# EAGLE board A-14732-40009 (EAGLE 7.4.0)

Size 160 x 100 mm. Coordinates in mm from the lower left corner, seen from the top.
Outline: 0,0 160,0 160,100 0,100 0,0
Copper layers (1*16): Top 0.035mm / dielectric 1.5mm / Bottom 0.035mm
Design rules "default": minimum track width 10mil, minimum drill 24mil, track to track 8mil, track to pad 8mil, pad to pad 8mil, via to via 8mil, smd to smd 8mil, copper to edge 40mil, drill to drill 8mil, minimum pad ring 10mil, minimum via ring 8mil, stop-mask expansion 4mil, vias tented up to drill 0mil, thermal gap 10mil

## Footprints (pad centres in the part's own frame; a part is rotated, then mirrored left to right if it is on the bottom)
NIC_10X10.5_CAP = smd 4.5 x 2.5: + 4.5,0; - -4.5,0
1206-CAP = smd 1.6 x 1.8: 1 -1.4,0; 2 1.4,0
0805-CAP = smd 0.8 x 1.2: 1 -0.9,0; 2 0.9,0
EIA3216 = smd 1.4 x 1.6: A 1.4,0; C -1.4,0
SMA-DIODE = smd 1.27 x 1.47: A -2.15,0; C 2.15,0
NPI75C = smd 3 x 7.5: 1 -2.5,0; 2 2.5,0
STANDOFF-ELECTRICAL = drill 3.2 pad 6.35: P1 0,0
2X10_ROUND_NOSILK = drill 1.016 pad 1.88: 1 -11.43,-1.27; 2 -11.43,1.27; 3 -8.89,-1.27; 4 -8.89,1.27; 5 -6.35,-1.27; 6 -6.35,1.27; 7 -3.81,-1.27; 8 -3.81,1.27; 9 -1.27,-1.27; 10 -1.27,1.27; 11 1.27,-1.27; 12 1.27,1.27; 13 3.81,-1.27; 14 3.81,1.27; 15 6.35,-1.27; 16 6.35,1.27; 17 8.89,-1.27; 18 8.89,1.27; 19 11.43,-1.27; 20 11.43,1.27
1X03_LONGPADS = drill 1.118 pad 1.88 long: 1 0,0; 2 2.54,0; 3 5.08,0
1X04_LONGPADS = drill 1.118 pad 1.88 long: 1 0,0; 2 2.54,0; 3 5.08,0; 4 7.62,0
1X4MTA = drill 1.676 long: 1 5.944,0; 2 1.981,0; 3 -1.981,0; 4 -5.944,0
1X6MTA = drill 1.676 long: 1 9.906,0; 2 5.944,0; 3 1.981,0; 4 -1.981,0; 5 -5.944,0; 6 -9.906,0
SOT23-3 = smd 0.8 x 0.9: 1 -0.95,-1; 2 0.95,-1; 3 0,1.1
R1206 = smd 1.6 x 1.803: 1 -1.422,0; 2 1.422,0
OKI6295 = smd 0.4 x 2.2: 1 -4,-6.25; 2 -3.2,-6.25; 3 -2.4,-6.25; 4 -1.6,-6.25; 5 -0.8,-6.25; 6 0,-6.25; 7 0.8,-6.25; 8 1.6,-6.25; 9 2.4,-6.24; 10 3.2,-6.25; 11 4,-6.25; 23 4,6.25; 24 3.2,6.25; 25 2.4,6.26; 26 1.6,6.25; 27 0.8,6.25; 28 0,6.25; 29 -0.8,6.25; 30 -1.6,6.25; 31 -2.4,6.25; 32 -3.2,6.25; 33 -4,6.25 | smd 2.2 x 0.4: 12 6.75,-4; 13 6.75,-3.2; 14 6.75,-2.4; 15 6.75,-1.6; 16 6.75,-0.8; 17 6.75,0; 18 6.75,0.8; 19 6.75,1.6; 20 6.74,2.4; 21 6.75,3.2; 22 6.75,4; 34 -6.75,4; 35 -6.75,3.2; 36 -6.76,2.4; 37 -6.75,1.6; 38 -6.75,0.8; 39 -6.75,0; 40 -6.75,-0.8; 41 -6.75,-1.6; 42 -6.75,-2.4; 43 -6.75,-3.2; 44 -6.75,-4
MS6264L = drill 0.813 long: 1 -16.51,-7.62; 2 -13.97,-7.62; 3 -11.43,-7.62; 4 -8.89,-7.62; 5 -6.35,-7.62; 6 -3.81,-7.62; 7 -1.27,-7.62; 8 1.27,-7.62; 9 3.81,-7.62; 10 6.35,-7.62; 11 8.89,-7.62; 12 11.43,-7.62; 13 13.97,-7.62; 14 16.51,-7.62; 15 16.51,7.62; 16 13.97,7.62; 17 11.43,7.62; 18 8.89,7.62; 19 6.35,7.62; 20 3.81,7.62; 21 1.27,7.62; 22 -1.27,7.62; 23 -3.81,7.62; 24 -6.35,7.62; 25 -8.89,7.62; 26 -11.43,7.62; 27 -13.97,7.62; 28 -16.51,7.62
27C040 = drill 0.813 long: 1 -19.05,-7.62; 2 -16.51,-7.62; 3 -13.97,-7.62; 4 -11.43,-7.62; 5 -8.89,-7.62; 6 -6.35,-7.62; 7 -3.81,-7.62; 8 -1.27,-7.62; 9 1.27,-7.62; 10 3.81,-7.62; 11 6.35,-7.62; 12 8.89,-7.62; 13 11.43,-7.62; 14 13.97,-7.62; 15 16.51,-7.62; 16 19.05,-7.62; 17 19.05,7.62; 18 16.51,7.62; 19 13.97,7.62; 20 11.43,7.62; 21 8.89,7.62; 22 6.35,7.62; 23 3.81,7.62; 24 1.27,7.62; 25 -1.27,7.62; 26 -3.81,7.62; 27 -6.35,7.62; 28 -8.89,7.62; 29 -11.43,7.62; 30 -13.97,7.62; 31 -16.51,7.62; 32 -19.05,7.62
6809E = drill 0.813 long: 1 -24.13,-7.62; 2 -21.59,-7.62; 3 -19.05,-7.62; 4 -16.51,-7.62; 5 -13.97,-7.62; 6 -11.43,-7.62; 7 -8.89,-7.62; 8 -6.35,-7.62; 9 -3.81,-7.62; 10 -1.27,-7.62; 11 1.27,-7.62; 12 3.81,-7.62; 13 6.35,-7.62; 14 8.89,-7.62; 15 11.43,-7.62; 16 13.97,-7.62; 17 16.51,-7.62; 18 19.05,-7.62; 19 21.59,-7.62; 20 24.13,-7.62; 21 24.13,7.62; 22 21.59,7.62; 23 19.05,7.62; 24 16.51,7.62; 25 13.97,7.62; 26 11.43,7.62; 27 8.89,7.62; 28 6.35,7.62; 29 3.81,7.62; 30 1.27,7.62; 31 -1.27,7.62; 32 -3.81,7.62; 33 -6.35,7.62; 34 -8.89,7.62; 35 -11.43,7.62; 36 -13.97,7.62; 37 -16.51,7.62; 38 -19.05,7.62; 39 -21.59,7.62; 40 -24.13,7.62
SO20W = smd 0.66 x 2.032: 1 -5.715,-5.029; 2 -4.445,-5.029; 3 -3.175,-5.029; 4 -1.905,-5.029; 5 -0.635,-5.029; 6 0.635,-5.029; 7 1.905,-5.029; 8 3.175,-5.029; 9 4.445,-5.029; 10 5.715,-5.029; 11 5.715,5.029; 12 4.445,5.029; 13 3.175,5.029; 14 1.905,5.029; 15 0.635,5.029; 16 -0.635,5.029; 17 -1.905,5.029; 18 -3.175,5.029; 19 -4.445,5.029; 20 -5.715,5.029
SO16 = smd 0.66 x 2.032: 1 -4.445,-3.073; 2 -3.175,-3.073; 3 -1.905,-3.073; 4 -0.635,-3.073; 5 0.635,-3.073; 6 1.905,-3.073; 7 3.175,-3.073; 8 4.445,-3.073; 9 4.445,3.073; 10 3.175,3.073; 11 1.905,3.073; 12 0.635,3.073; 13 -0.635,3.073; 14 -1.905,3.073; 15 -3.175,3.073; 16 -4.445,3.073
SO14 = smd 0.66 x 2.032: 1 -3.81,-3.073; 2 -2.54,-3.073; 3 -1.27,-3.073; 4 0,-3.073; 5 1.27,-3.073; 6 2.54,-3.073; 7 3.81,-3.073; 8 3.81,3.073; 9 2.54,3.073; 10 1.27,3.073; 11 0,3.073; 12 -1.27,3.073; 13 -2.54,3.073; 14 -3.81,3.073
YM2151 = drill 0.813 long: 1 -13.97,-7.62; 2 -11.43,-7.62; 3 -8.89,-7.62; 4 -6.35,-7.62; 5 -3.81,-7.62; 6 -1.27,-7.62; 7 1.27,-7.62; 8 3.81,-7.62; 9 6.35,-7.62; 10 8.89,-7.62; 11 11.43,-7.62; 12 13.97,-7.62; 13 13.97,7.62; 14 11.43,7.62; 15 8.89,7.62; 16 6.35,7.62; 17 3.81,7.62; 18 1.27,7.62; 19 -1.27,7.62; 20 -3.81,7.62; 21 -6.35,7.62; 22 -8.89,7.62; 23 -11.43,7.62; 24 -13.97,7.62
SOIC16N = smd 0.6 x 2.2: 1 -4.445,-2.6; 2 -3.175,-2.6; 3 -1.905,-2.6; 4 -0.635,-2.6; 5 0.635,-2.6; 6 1.905,-2.6; 7 3.175,-2.6; 8 4.445,-2.6; 9 4.445,2.6; 10 3.175,2.6; 11 1.905,2.6; 12 0.635,2.6; 13 -0.635,2.6; 14 -1.905,2.6; 15 -3.175,2.6; 16 -4.445,2.6
16L8 = drill 0.813 long: 1 -11.43,-3.81; 2 -8.89,-3.81; 3 -6.35,-3.81; 4 -3.81,-3.81; 5 -1.27,-3.81; 6 1.27,-3.81; 7 3.81,-3.81; 8 6.35,-3.81; 9 8.89,-3.81; 10 11.43,-3.81; 11 11.43,3.81; 12 8.89,3.81; 13 6.35,3.81; 14 3.81,3.81; 15 1.27,3.81; 16 -1.27,3.81; 17 -3.81,3.81; 18 -6.35,3.81; 19 -8.89,3.81; 20 -11.43,3.81
YM3012 = drill 0.813 long: 1 -8.89,-3.81; 2 -6.35,-3.81; 3 -3.81,-3.81; 4 -1.27,-3.81; 5 1.27,-3.81; 6 3.81,-3.81; 7 6.35,-3.81; 8 8.89,-3.81; 9 8.89,3.81; 10 6.35,3.81; 11 3.81,3.81; 12 1.27,3.81; 13 -1.27,3.81; 14 -3.81,3.81; 15 -6.35,3.81; 16 -8.89,3.81
SO14' = smd 0.6 x 2.2: 1 -3.81,-2.6; 2 -2.54,-2.6; 3 -1.27,-2.6; 4 0,-2.6; 5 1.27,-2.6; 6 2.54,-2.6; 7 3.81,-2.6; 8 3.81,2.6; 9 2.54,2.6; 10 1.27,2.6; 11 0,2.6; 12 -1.27,2.6; 13 -2.54,2.6; 14 -3.81,2.6
MC3340 = drill 0.813 long: 1 -3.81,-3.81; 2 -1.27,-3.81; 3 1.27,-3.81; 4 3.81,-3.81; 5 3.81,3.81; 6 1.27,3.81; 7 -1.27,3.81; 8 -3.81,3.81
ZIP15 = drill 0.813: 1 -10.16,-1.27 | drill 0.813 octagon: 2 -8.89,1.27; 3 -7.62,-1.27; 4 -6.35,1.27; 5 -5.08,-1.27; 6 -3.81,1.27; 7 -2.54,-1.27; 8 -1.27,1.27; 9 0,-1.27; 10 1.27,1.27; 11 2.54,-1.27; 12 3.81,1.27; 13 5.08,-1.27; 14 6.35,1.27; 15 7.62,-1.27
7809-D2PAK = smd 2.083 x 3.81: 1 -2.54,-8.89; 3 2.54,-8.89 | smd 11.43 x 8.89: 2 0,2.54
SJ = smd 1.168 x 1.6: 1 -0.762,0; 2 0.762,0
SM49 = smd 5.08 x 1.778: 1 -4.826,0; 2 4.826,0
CRYSTAL-OSC-SMD-5X3 = smd 1.9 x 1.1: 1 -1.85,-1.15; 2 1.85,-1.15; 3 1.85,1.15; 4 -1.85,1.15

## Placement (x,y rotation side)
C1  47uF  [NIC_10X10.5_CAP]  -99.06,67.31 0 top  (outside the outline)
C2  .01uF  [1206-CAP]  -57.15,146.05 0 top  (outside the outline)
C3  .01uF  [1206-CAP]  -62.23,146.05 0 top  (outside the outline)
C4  .01uF  [1206-CAP]  -67.31,146.05 0 top  (outside the outline)
C5  .01uF  [1206-CAP]  -72.39,146.05 0 top  (outside the outline)
C6  .01uF  [1206-CAP]  -77.47,146.05 0 top  (outside the outline)
C7  .01uF  [1206-CAP]  -82.55,146.05 0 top  (outside the outline)
C8  .01uF  [1206-CAP]  -87.63,146.05 0 top  (outside the outline)
C9  .01uF  [1206-CAP]  -92.71,146.05 0 top  (outside the outline)
C10  .01uF  [1206-CAP]  -97.79,146.05 0 top  (outside the outline)
C11  .01uF  [1206-CAP]  -102.87,146.05 0 top  (outside the outline)
C12  .01uF  [1206-CAP]  -107.95,146.05 0 top  (outside the outline)
C13  .01uF  [1206-CAP]  -113.03,146.05 0 top  (outside the outline)
C14  .01uF  [1206-CAP]  -118.11,146.05 0 top  (outside the outline)
C15  .01uF  [1206-CAP]  -123.19,146.05 0 top  (outside the outline)
C16  .01uF  [1206-CAP]  -128.27,146.05 0 top  (outside the outline)
C17  .01uF  [1206-CAP]  -133.35,146.05 0 top  (outside the outline)
C18  .01uF  [1206-CAP]  -138.43,146.05 0 top  (outside the outline)
C19  .01uF  [1206-CAP]  -143.51,146.05 0 top  (outside the outline)
C20  .01uF  [1206-CAP]  -148.59,146.05 0 top  (outside the outline)
C21  .01uF  [1206-CAP]  -15.24,151.13 0 top  (outside the outline)
C22  .01uF  [1206-CAP]  -20.32,151.13 0 top  (outside the outline)
C23  .01uF  [1206-CAP]  -25.4,151.13 0 top  (outside the outline)
C24  .01uF  [1206-CAP]  -30.48,151.13 0 top  (outside the outline)
C25  .01uF  [1206-CAP]  -35.56,151.13 0 top  (outside the outline)
C26  .01uF  [1206-CAP]  -40.64,151.13 0 top  (outside the outline)
C28  .01uF  [1206-CAP]  -45.72,151.13 0 top  (outside the outline)
C29  .01uF  [1206-CAP]  -50.8,151.13 0 top  (outside the outline)
C30  33pF  [1206-CAP]  -55.88,151.13 0 top  (outside the outline)
C31  .01uF  [1206-CAP]  -60.96,151.13 0 top  (outside the outline)
C32  .01uF  [1206-CAP]  -66.04,151.13 0 top  (outside the outline)
C33  .01uF  [1206-CAP]  -71.12,151.13 0 top  (outside the outline)
C35  100pF  [1206-CAP]  -76.2,151.13 0 top  (outside the outline)
C36  100pF  [1206-CAP]  -81.28,151.13 0 top  (outside the outline)
C37  100pF  [1206-CAP]  -86.36,151.13 0 top  (outside the outline)
C38  100pF  [1206-CAP]  -91.44,151.13 0 top  (outside the outline)
C39  100pF  [1206-CAP]  -96.52,151.13 0 top  (outside the outline)
C40  100pF  [1206-CAP]  -101.6,151.13 0 top  (outside the outline)
C41  100pF  [1206-CAP]  -106.68,151.13 0 top  (outside the outline)
C42  100pF  [1206-CAP]  -111.76,151.13 0 top  (outside the outline)
C43  100pF  [1206-CAP]  -116.84,151.13 0 top  (outside the outline)
C44  100pF  [1206-CAP]  -121.92,151.13 0 top  (outside the outline)
C45  100pF  [1206-CAP]  -127,151.13 0 top  (outside the outline)
C46  10uF  [NIC_10X10.5_CAP]  -113.03,67.31 0 top  (outside the outline)
C47  100pF  [1206-CAP]  -132.08,151.13 0 top  (outside the outline)
C48  .001uF  [1206-CAP]  -137.16,151.13 0 top  (outside the outline)
C49  100pF  [1206-CAP]  -142.24,151.13 0 top  (outside the outline)
C50  68pF  [1206-CAP]  -147.32,151.13 0 top  (outside the outline)
C51  3.3nF  [1206-CAP]  -15.24,154.94 0 top  (outside the outline)
C52  3.9nF  [1206-CAP]  -20.32,154.94 0 top  (outside the outline)
C53  10uF  [NIC_10X10.5_CAP]  -127,67.31 0 top  (outside the outline)
C54  220pF  [1206-CAP]  -25.4,154.94 0 top  (outside the outline)
C55  .001uF  [1206-CAP]  -30.48,154.94 0 top  (outside the outline)
C56  3.3nF  [1206-CAP]  -35.56,154.94 0 top  (outside the outline)
C57  10uF  [NIC_10X10.5_CAP]  -140.97,67.31 0 top  (outside the outline)
C58  2.7nF  [1206-CAP]  -40.64,154.94 0 top  (outside the outline)
C60  33pF  [1206-CAP]  -45.72,154.94 0 top  (outside the outline)
C61  220pF  [1206-CAP]  -50.8,154.94 0 top  (outside the outline)
C62  68pF  [1206-CAP]  -55.88,154.94 0 top  (outside the outline)
C63  47uF  [NIC_10X10.5_CAP]  -20.32,80.01 0 top  (outside the outline)
C64  10uF  [NIC_10X10.5_CAP]  -34.29,80.01 0 top  (outside the outline)
C65  0.22uF  [0805-CAP]  -137.16,154.94 0 top  (outside the outline)
C66  47uF  [NIC_10X10.5_CAP]  -48.26,80.01 0 top  (outside the outline)
C68  1uF  [NIC_10X10.5_CAP]  -62.23,80.01 0 top  (outside the outline)
C69  2.2nF  [1206-CAP]  -60.96,154.94 0 top  (outside the outline)
C70  100uF  [NIC_10X10.5_CAP]  -76.2,80.01 0 top  (outside the outline)
C71  470pF  [1206-CAP]  -66.04,154.94 0 top  (outside the outline)
C72  0.1uF  [1206-CAP]  -71.12,154.94 0 top  (outside the outline)
C73  10uF  [NIC_10X10.5_CAP]  -90.17,80.01 0 top  (outside the outline)
C74  0.1uF  [1206-CAP]  -76.2,154.94 0 top  (outside the outline)
C75  10uF  [NIC_10X10.5_CAP]  -104.14,80.01 0 top  (outside the outline)
C76  .001uF  [1206-CAP]  -81.28,154.94 0 top  (outside the outline)
C78  820pF  [1206-CAP]  -86.36,154.94 0 top  (outside the outline)
C79  220uF  [NIC_10X10.5_CAP]  -118.11,80.01 0 top  (outside the outline)
C80  47uF  [NIC_10X10.5_CAP]  -132.08,80.01 0 top  (outside the outline)
C81  10uF  [NIC_10X10.5_CAP]  -146.05,80.01 0 top  (outside the outline)
C83  220uF  [NIC_10X10.5_CAP]  -20.32,91.44 0 top  (outside the outline)
C84  220uF  [NIC_10X10.5_CAP]  -34.29,91.44 0 top  (outside the outline)
C85  100uF  [NIC_10X10.5_CAP]  -48.26,91.44 0 top  (outside the outline)
C86  100uF  [NIC_10X10.5_CAP]  -62.23,91.44 0 top  (outside the outline)
C87  100uF  [NIC_10X10.5_CAP]  -76.2,91.44 0 top  (outside the outline)
C88  0.1uF  [1206-CAP]  -91.44,154.94 0 top  (outside the outline)
C89  0.1uF  [1206-CAP]  -96.52,154.94 0 top  (outside the outline)
C90  0.1uF  [1206-CAP]  -101.6,154.94 0 top  (outside the outline)
C91  0.1uF  [1206-CAP]  -106.68,154.94 0 top  (outside the outline)
C92  0.1uF  [1206-CAP]  -111.76,154.94 0 top  (outside the outline)
C95  2200uF  [NIC_10X10.5_CAP]  -90.17,91.44 0 top  (outside the outline)
C96  220pF  [1206-CAP]  -116.84,154.94 0 top  (outside the outline)
C97  .01uF  [1206-CAP]  -121.92,154.94 0 top  (outside the outline)
C98  100pF  [1206-CAP]  -127,154.94 0 top  (outside the outline)
C99  0.01uF  [1206-CAP]  -132.08,154.94 0 top  (outside the outline)
C100  10uF  [EIA3216]  -142.24,154.94 0 top  (outside the outline)
C102  10uF  [NIC_10X10.5_CAP]  -104.14,91.44 0 top  (outside the outline)
C103  100uF  [NIC_10X10.5_CAP]  -118.11,91.44 0 top  (outside the outline)
CR1  1N4148  [SMA-DIODE]  -50.8,146.05 0 top  (outside the outline)
L1  4.7uH  [NPI75C]  -125.73,110.49 0 top  (outside the outline)
L2  4.7uH  [NPI75C]  -134.62,110.49 0 top  (outside the outline)
MTG1  MTGHOLE  [STANDOFF-ELECTRICAL]  -63.5,119.38 0 top  (outside the outline)
MTG2  MTGHOLE  [STANDOFF-ELECTRICAL]  -71.12,119.38 0 top  (outside the outline)
MTG3  MTGHOLE  [STANDOFF-ELECTRICAL]  -78.74,119.38 0 top  (outside the outline)
MTG4  MTGHOLE  [STANDOFF-ELECTRICAL]  -86.36,119.38 0 top  (outside the outline)
P1  [2X10_ROUND_NOSILK]  -46.99,119.38 0 top  (outside the outline)
P2  AUX IN  [1X03_LONGPADS]  -67.31,101.6 0 top  (outside the outline)
P3  AUX OUT  [1X03_LONGPADS]  -58.42,101.6 0 top  (outside the outline)
P4  ORKIN R/W  [1X04_LONGPADS]  -48.26,101.6 0 top  (outside the outline)
P5  VOLUME  [1X4MTA]  -96.52,48.26 0 top  (outside the outline)
P6  0.156"  [1X6MTA]  -74.93,48.26 0 top  (outside the outline)
P7  0.156"  [1X4MTA]  -114.3,48.26 0 top  (outside the outline)
Q1  MPS3646  [SOT23-3]  -45.72,146.05 0 top  (outside the outline)
R1  4.7K  [R1206]  -35.56,128.27 0 top  (outside the outline)
R2  4.7K  [R1206]  -41.91,128.27 0 top  (outside the outline)
R3  4.7K  [R1206]  -48.26,128.27 0 top  (outside the outline)
R4  100  [R1206]  -46.99,134.62 0 top  (outside the outline)
R5  4.7K  [R1206]  -54.61,128.27 0 top  (outside the outline)
R6  4.7K  [R1206]  -60.96,128.27 0 top  (outside the outline)
R7  4.7K  [R1206]  -67.31,128.27 0 top  (outside the outline)
R8  4.7K  [R1206]  -73.66,128.27 0 top  (outside the outline)
R9  4.7K  [R1206]  -80.01,128.27 0 top  (outside the outline)
R10  4.7K  [R1206]  -86.36,128.27 0 top  (outside the outline)
R11  47  [R1206]  -52.07,134.62 0 top  (outside the outline)
R12  47  [R1206]  -57.15,134.62 0 top  (outside the outline)
R13  47  [R1206]  -62.23,134.62 0 top  (outside the outline)
R14  47  [R1206]  -67.31,134.62 0 top  (outside the outline)
R15  47  [R1206]  -72.39,134.62 0 top  (outside the outline)
R16  47  [R1206]  -77.47,134.62 0 top  (outside the outline)
R17  47  [R1206]  -82.55,134.62 0 top  (outside the outline)
R18  47  [R1206]  -87.63,134.62 0 top  (outside the outline)
R19  47  [R1206]  -92.71,134.62 0 top  (outside the outline)
R20  47  [R1206]  -97.79,134.62 0 top  (outside the outline)
R21  47  [R1206]  -102.87,134.62 0 top  (outside the outline)
R22  2.2K  [R1206]  -92.71,128.27 0 top  (outside the outline)
R23  2.2K  [R1206]  -99.06,128.27 0 top  (outside the outline)
R24  2.2K  [R1206]  -105.41,128.27 0 top  (outside the outline)
R25  4.7K  [R1206]  -111.76,128.27 0 top  (outside the outline)
R26  2.2K  [R1206]  -118.11,128.27 0 top  (outside the outline)
R27  4.7K  [R1206]  -124.46,128.27 0 top  (outside the outline)
R28  4.7K  [R1206]  -130.81,128.27 0 top  (outside the outline)
R29  47K  [R1206]  -107.95,134.62 0 top  (outside the outline)
R30  100  [R1206]  -113.03,134.62 0 top  (outside the outline)
R31  68K  [R1206]  -118.11,134.62 0 top  (outside the outline)
R32  470  [R1206]  -123.19,134.62 0 top  (outside the outline)
R33  100K  [R1206]  -93.98,119.38 0 top  (outside the outline)
R34  470  [R1206]  -128.27,134.62 0 top  (outside the outline)
R35  75K  [R1206]  -133.35,134.62 0 top  (outside the outline)
R36  39K  [R1206]  -138.43,134.62 0 top  (outside the outline)
R37  820K  [R1206]  -100.33,119.38 0 top  (outside the outline)
R38  62K  [R1206]  -143.51,134.62 0 top  (outside the outline)
R39  130K  [R1206]  -106.68,119.38 0 top  (outside the outline)
R40  150K  [R1206]  -113.03,119.38 0 top  (outside the outline)
R41  470  [R1206]  -148.59,134.62 0 top  (outside the outline)
R42  820K  [R1206]  -119.38,119.38 0 top  (outside the outline)
R43  1K  [R1206]  -15.24,140.97 0 top  (outside the outline)
R44  150K  [R1206]  -125.73,119.38 0 top  (outside the outline)
R45  62K  [R1206]  -20.32,140.97 0 top  (outside the outline)
R46  150K  [R1206]  -132.08,119.38 0 top  (outside the outline)
R48  100K  [R1206]  -138.43,119.38 0 top  (outside the outline)
R51  62K  [R1206]  -25.4,140.97 0 top  (outside the outline)
R52  150K  [R1206]  -144.78,119.38 0 top  (outside the outline)
R53  47K  [R1206]  -30.48,140.97 0 top  (outside the outline)
R54  100K  [R1206]  -151.13,119.38 0 top  (outside the outline)
R55  100K  [R1206]  -16.51,128.27 0 top  (outside the outline)
R59  2.2K  [R1206]  -137.16,128.27 0 top  (outside the outline)
R60  100K  [R1206]  -22.86,128.27 0 top  (outside the outline)
R61  2.2K  [R1206]  -143.51,128.27 0 top  (outside the outline)
R62  10K  [R1206]  -35.56,140.97 0 top  (outside the outline)
R63  10K  [R1206]  -40.64,140.97 0 top  (outside the outline)
R64  12K  [R1206]  -45.72,140.97 0 top  (outside the outline)
R65  100K  [R1206]  -29.21,128.27 0 top  (outside the outline)
R67  10K  [R1206]  -50.8,140.97 0 top  (outside the outline)
R68  1K  [R1206]  -55.88,140.97 0 top  (outside the outline)
R69  8.2K  [R1206]  -149.86,128.27 0 top  (outside the outline)
R70  10K  [R1206]  -60.96,140.97 0 top  (outside the outline)
R71  68K  [R1206]  -66.04,140.97 0 top  (outside the outline)
R72  3.3  [R1206]  -71.12,140.97 0 top  (outside the outline)
R73  3.3  [R1206]  -76.2,140.97 0 top  (outside the outline)
R74  3.3  [R1206]  -81.28,140.97 0 top  (outside the outline)
R77  56K  [R1206]  -86.36,140.97 0 top  (outside the outline)
R78  56K  [R1206]  -91.44,140.97 0 top  (outside the outline)
R79  82K  [R1206]  -96.52,140.97 0 top  (outside the outline)
R80  10K  [R1206]  -101.6,140.97 0 top  (outside the outline)
R81  47K  [R1206]  -106.68,140.97 0 top  (outside the outline)
R82  220  [R1206]  -111.76,140.97 0 top  (outside the outline)
R83  470  [R1206]  -116.84,140.97 0 top  (outside the outline)
R84  4.7K  [R1206]  -16.51,134.62 0 top  (outside the outline)
R85  4.7K  [R1206]  -22.86,134.62 0 top  (outside the outline)
R86  4.7K  [R1206]  -29.21,134.62 0 top  (outside the outline)
R87  3.9K  [R1206]  -35.56,134.62 0 top  (outside the outline)
R88  27K  [R1206]  -121.92,140.97 0 top  (outside the outline)
R89  10  [R1206]  -127,140.97 0 top  (outside the outline)
R90  100  [R1206]  -132.08,140.97 0 top  (outside the outline)
R91  4.7K  [R1206]  -41.91,134.62 0 top  (outside the outline)
U1  OKI6295  [OKI6295]  -54.61,48.26 0 top  (outside the outline)
U2  2064  [MS6264L]  -120.65,30.48 0 top  (outside the outline)
U3  27C040  [27C040]  -100.33,10.16 0 top  (outside the outline)
U4  6809E  [6809E]  -50.8,10.16 0 top  (outside the outline)
U5  74LS374DW  [SO20W]  -130.81,46.99 0 top  (outside the outline)
U6  26LS32A  [SO16]  -74.93,101.6 0 top  (outside the outline)
U7  26LS31  [SO16]  -87.63,101.6 0 top  (outside the outline)
U8  74LS138  [SO16]  -100.33,101.6 0 top  (outside the outline)
U9  74LS74  [SO14]  -57.15,111.76 0 top  (outside the outline)
U10  26LS32A  [SO16]  -113.03,101.6 0 top  (outside the outline)
U11  26LS31  [SO16]  -125.73,101.6 0 top  (outside the outline)
U12  27C040-150  [27C040]  -34.29,30.48 0 top  (outside the outline)
U13  27C040-150  [27C040]  -78.74,30.48 0 top  (outside the outline)
U14  YAMAHA 2151  [YM2151]  -27.94,50.8 0 top  (outside the outline)
U15  TIL7524  [SOIC16N]  -144.78,110.49 0 top  (outside the outline)
U16  74LS374  [SO20W]  -20.32,67.31 0 top  (outside the outline)
U17  74LS174  [SO16]  -138.43,101.6 0 top  (outside the outline)
U18  16L8  [16L8]  -41.91,67.31 0 top  (outside the outline)
U19  74LS11  [SO14]  -68.58,111.76 0 top  (outside the outline)
U20  74LS139  [SO16]  -19.05,111.76 0 top  (outside the outline)
U21  74LS14  [SO14]  -80.01,111.76 0 top  (outside the outline)
U22  74LS74  [SO14]  -91.44,111.76 0 top  (outside the outline)
U23  74LS74  [SO14]  -102.87,111.76 0 top  (outside the outline)
U24  26LS31  [SO16]  -31.75,111.76 0 top  (outside the outline)
U25  26LS32A  [SO16]  -44.45,111.76 0 top  (outside the outline)
U26  74LS04  [SO14]  -114.3,111.76 0 top  (outside the outline)
U28  YAMAHA 3012  [YM3012]  -67.31,67.31 0 top  (outside the outline)
U29  LM324D  [SO14']  -132.08,90.17 0 top  (outside the outline)
U30  MC3340  [MC3340]  -85.09,67.31 0 top  (outside the outline)
U31  HA3116  [ZIP15]  -22.86,119.38 0 top  (outside the outline)
U32  TL084D  [SO14']  -19.05,101.6 0 top  (outside the outline)
U33  TL084D  [SO14']  -31.75,101.6 0 top  (outside the outline)
VR1  7809  [7809-D2PAK]  -19.05,11.43 0 top  (outside the outline)
W1  JMP24G  [SJ]  -144.78,139.7 0 top  (outside the outline)
W2  JMP24G  [SJ]  -149.86,139.7 0 top  (outside the outline)
W3  JMP24G  [SJ]  -15.24,146.05 0 top  (outside the outline)
W4  JMP24G  [SJ]  -20.32,146.05 0 top  (outside the outline)
W5  JMP24G  [SJ]  -25.4,146.05 0 top  (outside the outline)
W6  JMP24G  [SJ]  -30.48,146.05 0 top  (outside the outline)
W7  0  [SJ]  -35.56,146.05 0 top  (outside the outline)
W8  JMP24G  [SJ]  -40.64,146.05 0 top  (outside the outline)
Y1  3.5749MHz  [SM49]  -146.05,91.44 0 top  (outside the outline)
Y2  8MHz  [CRYSTAL-OSC-SMD-5X3]  -138.43,140.97 0 top  (outside the outline)

## Library data of the parts
C1 C53 C57 C63 C64 C66 C70 C73 C75 C81 C85-C87 C102 C103 = SparkFun-Capacitors; PROD_ID: CAP-08362; VOLTAGE: 16V
C2-C26 C28-C33 C35-C45 C47-C52 C54-C56 C58 C60 C61 C69 C71 C72 C74 C76 C78 C88-C92 C96-C99 = SparkFun-Capacitors; VOLTAGE: 50V
C46 = SparkFun-Capacitors; PROD_ID: CAP-08362; VOLTAGE: 15V
C62 = SparkFun-Capacitors
C65 = SparkFun-Capacitors; PROD_ID: CAP-08469; VOLTAGE: 50V
C68 C79 C80 C83 C84 C95 = SparkFun-Capacitors; PROD_ID: CAP-08362; VOLTAGE: 25V
C100 = SparkFun-Capacitors; PROD_ID: CAP-00811
CR1 = SparkFun-DiscreteSemi
L1 = SparkFun-Passives; CUR: 3.0A
L2 = SparkFun-Passives; CURRENT: 3.0A
MTG1-MTG4 = SparkFun-Electromechanical
P1-P4 = SparkFun-Connectors
P5-P7 = con-amp
Q1 = SparkFun-DiscreteSemi; PROD_ID: TRANS-08049
R1-R46 R48 R51-R55 R59-R65 R67-R71 R77-R91 = resistor
R72-R74 = resistor; POWER: 1/2W
U1-U4 U12-U14 U18 U28 U30 = MK-ICs
U5 U8 U9 U16 U17 U19-U23 U26 = 74xx-us
U6 U7 U10 U11 U24 U25 U31 = A-14732-40009
U15 = analog-devices; MF: ALTERA CORPORATION; MPN: AD7524JRZ; OC_FARNELL: 1423882; OC_NEWARK: 59K4970
U29 U32 U33 = linear
VR1 = MK-ICs; PARTNUMBER: 5460-12743-00
W1-W8 = jumper
Y1 = crystal; OC_FARNELL: unknown; OC_NEWARK: unknown; TOLERANCE: 0.01%
Y2 = SparkFun-FreqCtrl; TOLERANCE: 0.01%

## Nets
5V: C2.1 C3.1 C4.1 C5.1 C6.1 C7.1 C8.1 C9.1 C10.1 C11.1 C12.1 C13.1 C14.1 C15.1 C16.1 C17.1 C18.1 C19.1 C20.1 C21.1 C22.1 C23.1 C24.1 C25.1 C26.1 C28.1 C70.+ C72.1 L1.1 R1.2 R2.2 R3.2 R5.2 R6.2 R7.2 R8.2 R9.2 R10.2 R22.2 R23.2 R24.2 R25.2 R26.2 R27.2 R29.2 R30.2 R69.2 R82.2 R84.2 R85.2 R86.2 R89.2 R91.2 U1.7 U2.28 U3.1 U3.32 U5.20 U6.16 U7.16 U8.6 U8.16 U9.14 U10.16 U11.16 U12.1 U12.32 U13.1 U13.32 U14.22 U15.14 U16.20 U17.16 U18.20 U19.14 U20.16 U21.14 U22.14 U23.14 U24.16 U25.16 U26.14 U28.1 Y2.4
12V: C29.1 C31.1 C32.2 C33.1 C85.+ C89.1 C95.+ L2.2 R54.1 R90.2 U29.4 U31.13 U32.4 U33.4 VR1.1
+9V: C65.2 U30.8 VR1.3
+12VDEC: C102.+ R48.2 R55.2 R90.1
/E: C62.1 R28.1 U18.5 U22.6 U23.2
/EORQ: U18.15 U20.1
/Q: U18.6 U23.6
/RAMWR: U18.16 W6.1
/RD: U1.2 U2.22 U14.6 U18.18
/WR: U1.3 U2.27 U14.5 U15.13 U18.19
A0: U2.10 U3.12 U4.8 U14.4
A1: U2.9 U3.11 U4.9
A2: U2.8 U3.10 U4.10
A3: U2.7 U3.9 U4.11
A4: U2.6 U3.8 U4.12
A5: U2.5 U3.7 U4.13
A6: U2.4 U3.6 U4.14
A7: U2.3 U3.5 U4.15
A8: U2.25 U3.27 U4.16
A9: U2.24 U3.26 U4.17
A10: U2.21 U3.23 U4.18 U8.1
A11: U2.23 U3.25 U4.19 U8.2
A12: U2.2 U3.4 U4.20 U8.3
A13: U3.28 U4.21 U20.14
A14: U4.22 U20.2
A15: U4.23 U20.3 W4.1 W5.1
ADPCM: U1.4 U8.12
ADPCMCLK: U1.5 U9.5
AGND: C29.2 C31.2 C32.1 C33.2 C48.2 C50.2 C51.2 C54.2 C56.2 C61.2 C63.- C64.- C65.1 C66.- C69.2 C73.- C76.2 C78.2 C79.- C80.- C83.- C84.- C85.- C88.2 C89.2 C95.- C97.1 C98.2 C102.- P2.1 P3.1 P5.4 R31.2 R33.1 R37.1 R41.1 R42.1 R59.1 R60.1 R61.1 R65.2 R68.1 R70.2 R72.2 R74.2 U15.2 U28.8 U28.16 U29.11 U30.3 U31.4 U31.12 U32.11 U33.11 VR1.2 W8.2
ATE1: R25.1 U9.10 U9.12 U16.13 U16.14 U16.17 U16.18 U17.3 U17.11 U17.13 U18.8 U19.9 U23.13 U24.4 U24.9 U25.4
ATE_CLR: R9.1 U9.1 U17.1 U22.1 U22.13 U23.1
B_SND_RD: C44.1 P1.15 R20.2
B_VIDDAV: P1.13 U25.14
B_VIDRES: P1.17 R85.1 U25.6
BS0: U17.5 U18.1
BS1: U17.15 U18.2
BS2: U17.7 U18.3 U19.10
D0: U1.37 U2.11 U3.13 U4.31 U5.3 U6.3 U14.10 U15.11 U16.3 U17.4
D1: U1.38 U2.12 U3.14 U4.30 U5.4 U6.5 U14.12 U15.10 U16.4 U17.14
D2: U1.39 U2.13 U3.15 U4.29 U5.7 U6.11 U14.13 U15.9 U16.7 U17.6
D3: U1.40 U2.15 U3.17 U4.28 U5.8 U6.13 U14.14 U15.8 U16.8
D4: U1.41 U2.16 U3.18 U4.27 U5.13 U10.3 U14.15 U15.7
D5: U1.42 U2.17 U3.19 U4.26 U5.14 U10.5 U14.16 U15.6
D6: U1.43 U2.18 U3.20 U4.25 U5.17 U10.11 U14.17 U15.5
D7: U1.44 U2.19 U3.21 U4.24 U5.18 U10.13 U14.18 U15.4
DAC: U8.13 U15.12
DAC-OUT: R61.2 R62.2 U29.8 U29.9
FFO: U9.9 U24.1
FIRQ: R7.1 U4.4 U14.2
GND: C2.2 C3.2 C4.2 C5.2 C6.2 C7.2 C8.2 C9.2 C10.2 C11.2 C12.2 C13.2 C14.2 C15.2 C16.2 C17.2 C18.2 C19.2 C20.2 C21.2 C22.2 C23.2 C24.2 C25.2 C26.2 C28.2 C35.2 C36.2 C37.2 C38.2 C39.2 C40.2 C41.2 C42.2 C43.2 C44.2 C45.2 C49.2 C70.- C72.2 C74.2 C99.2 C100.C C103.- MTG1.P1 MTG2.P1 MTG3.P1 MTG4.P1 P1.1 P4.1 P6.2 Q1.2 R4.2 R83.1 U1.1 U2.14 U3.16 U3.22 U4.1 U4.39 U5.10 U6.4 U6.8 U7.4 U7.8 U8.8 U9.7 U10.4 U10.8 U11.4 U11.8 U12.16 U12.22 U13.16 U13.22 U14.1 U14.11 U15.3 U16.10 U17.8 U18.10 U19.7 U20.8 U20.13 U21.3 U21.7 U21.11 U21.13 U22.7 U23.7 U24.8 U25.8 U26.7 U28.3 W8.1 Y2.2
IRQ: R5.1 U4.3 U23.9 U24.15
MIX-OUT: C68.- U30.1
N$1: U21.5 Y2.3
N$2: U21.6 U22.3 U23.3
N$3: C62.2 Q1.1 R28.2
N$4: U9.3 U22.5
N$5: U4.35 U22.2 U23.5
N$6: U9.2 U9.6
N$7: Q1.3 R27.1 U4.34
N$8: R10.1 U9.4 U22.4 U22.10 U22.11 U22.12 U23.4
N$9: R6.1 U4.40
N$10: U20.4 U20.15
N$11: R2.1 U4.2
N$12: U8.4 U8.5 U20.11
N$13: U19.3 U20.5
N$14: C100.A CR1.A R29.1 U21.9
N$15: CR1.C R30.1
N$16: U21.1 U21.8
N$17: U19.4 U20.6
N$18: U19.5 U20.7 U26.9
N$19: U19.1 U21.2
N$20: U8.15 U16.1
N$21: U16.11 U26.8
N$22: U2.20 U20.12
N$23: R1.1 U2.26
N$24: U3.24 U18.11 U19.6
N$25: R24.1 U3.3 U16.2
N$26: R23.1 U3.2 U16.5
N$27: R22.1 U16.6 W2.1
N$28: R26.1 U16.9 W3.1
N$29: U3.31 W3.2 W4.2
N$30: P4.4 R91.1 U18.7
N$31: C74.1 L1.2 P6.1
N$32: U3.29 W5.2 W6.2
N$33: R8.1 W1.1
N$34: C49.1 R32.1 U26.1 Y1.1
N$35: R32.2 R34.1 U26.2 U26.3
N$36: C47.2 R34.2 U26.4 U26.5
N$37: C47.1 Y1.2
N$38: U26.6 W7.2
N$39: U14.24 W7.1
N$40: U14.23 U28.2
N$41: U14.21 U28.4
N$42: U14.20 U28.6
N$43: U14.19 U28.5
N$44: C99.1 C103.+ R89.1 U1.17
N$45: U19.11 U26.12
N$46: U12.24 U19.8 U26.11
N$47: U13.24 U26.10
N$48: C46.- U1.36
N$49: C51.1 C53.- R37.2 U28.9
N$50: C56.1 C57.- R42.2 U28.10
N$51: R43.1 U29.1 U29.2
N$52: R43.2 U28.11
N$53: U28.12 U29.3
N$54: C55.2 R41.2 U28.13 U29.7
N$55: C55.1 U28.14 U29.6
N$56: C63.+ R68.2 R69.1 U15.1
N$57: C64.+ U28.15 U29.5
N$58: C98.1 U15.15 U29.12
N$59: C1.- R59.2 U29.13 U29.14
N$60: C1.+ R55.1 R60.2 U29.10
N$61: C46.+ R33.2 R48.1 U32.3
N$62: R39.2 U32.1 U32.2
N$63: C52.2 R38.2 R39.1
N$64: C52.1 R35.2 U32.13 U32.14
N$65: C50.1 R38.1 U32.12
N$66: C58.2 R35.1 R36.2
N$67: C48.1 R36.1 U32.5
N$68: C69.1 R62.1 R63.2 R64.2
N$69: C71.2 R64.1 U33.2
N$70: C71.1 R63.1 R79.2 U33.1
N$71: C60.1 R51.1 R77.2 U33.7
N$72: C61.1 R40.1 R51.2 R52.2
N$73: C60.2 R52.1 U33.6
N$74: C96.1 R53.1 R77.1 R78.1 R79.1 R81.1 R88.2 U33.13
N$75: P2.3 R53.2
N$76: C73.+ R54.2 R65.1 U32.10 U33.3 U33.5 U33.10 U33.12
N$77: U3.30 W1.2 W2.2
N$78: C54.1 R44.1 R45.2 R46.2
N$79: C30.1 R45.1 R78.2 U32.8
N$80: C30.2 R46.1 U32.9
N$81: C68.+ C96.2 R88.1 U33.14
N$82: R67.2 R80.1 U33.9
N$83: C88.1 L2.1 P6.5 P6.6
N$84: C75.+ R67.1 U33.8
N$85: C75.- P3.3
N$86: C66.+ C97.2 R87.1 U30.2
N$87: P5.2 R87.2
N$88: C76.1 U30.5
N$89: C81.+ R70.1 R71.2
N$90: R71.1 R80.2 U30.7
N$91: C78.1 C81.- R31.1 U31.3
N$92: C79.+ U31.1
N$93: C84.+ U31.2
N$94: C80.+ U31.5
N$95: C83.+ U31.6
N$96: C86.+ U31.10
N$97: C90.1 R72.1
N$98: U5.2 U7.1
N$99: C92.2 R73.1
N$100: C87.- C91.1 C92.1 P7.1 P7.2 U31.15
N$101: C91.2 R74.1
N$102: C87.+ U31.14
N$103: C86.- C90.2 P7.3 P7.4 R73.2 U31.8
N$104: U5.5 U7.7
N$105: U5.6 U7.9
N$106: U5.9 U7.15
N$107: U5.12 U11.1
N$108: U5.15 U11.7
N$109: U5.16 U11.9
N$110: U5.19 U11.15
N$111: R21.1 U24.2
N$112: R15.1 U10.2 U11.2
N$113: U23.11 U25.13
N$114: R4.1 U5.1 U23.12 U24.12 U25.12
N$115: R11.1 U6.2 U7.2
N$116: R16.1 U10.6 U11.6
N$117: R13.1 U6.6 U7.6
N$118: R17.1 U10.10 U11.10
N$119: R18.1 U10.14 U11.14
N$120: R82.1 R83.2 U6.1 U6.7 U6.9 U6.15 U10.1 U10.7 U10.9 U10.15 U25.1 U25.7 U25.9 U25.15
N$122: R14.1 U6.10 U7.10
N$123: R12.1 U6.14 U7.14
N$127: R20.1 U24.6
N$128: R19.1 U24.14
N$134: P1.16 R86.1 U25.10
PCM-A0: U1.18 U12.12 U13.12
PCM-A1: U1.19 U12.11 U13.11
PCM-A2: U1.20 U12.10 U13.10
PCM-A3: U1.21 U12.9 U13.9
PCM-A4: U1.22 U12.8 U13.8
PCM-A5: U1.23 U12.7 U13.7
PCM-A6: U1.24 U12.6 U13.6
PCM-A7: U1.25 U12.5 U13.5
PCM-A8: U1.26 U12.27 U13.27
PCM-A9: U1.27 U12.26 U13.26
PCM-A10: U1.28 U12.23 U13.23
PCM-A11: U1.29 U12.25 U13.25
PCM-A12: U1.30 U12.4 U13.4
PCM-A13: U1.31 U12.28 U13.28
PCM-A14: U1.32 U12.29 U13.29
PCM-A15: U1.33 U12.3 U13.3
PCM-A16: U1.34 U12.2 U13.2
PCM-A17: U1.35 U18.4 U26.13
PCM-BS: U8.10 U17.9
PCM-D0: U1.9 U12.13 U13.13
PCM-D1: U1.10 U12.14 U13.14
PCM-D2: U1.11 U12.15 U13.15
PCM-D3: U1.12 U12.17 U13.17 U13.18
PCM-D4: U1.13 U12.18
PCM-D5: U1.14 U12.19 U13.19
PCM-D6: U1.15 U12.20 U13.20
PCM-D7: U1.16 U12.21 U13.21
PCM-OUT: C58.1 R81.2 U32.6 U32.7
R/W: U4.32 U18.9
RA17-0: U12.30 U18.17
RA17-1: U13.30 U18.14
RA18-0: U12.31 U18.12
RA18-1: U13.31 U18.13
RD-LATCH: U6.12 U8.11 U10.12 U23.10 U24.7
RESET: R3.1 U1.8 U4.37 U14.3 U19.12 U28.7
SND_DAT0: C35.1 P1.3 R11.2
SND_DAT1: C37.1 P1.4 R13.2
SND_DAT2: C38.1 P1.5 R14.2
SND_DAT3: C36.1 P1.6 R12.2
SND_DAT4: C39.1 P1.7 R15.2
SND_DAT5: C40.1 P1.8 R16.2
SND_DAT6: C41.1 P1.9 R17.2
SND_DAT7: C42.1 P1.10 R18.2
SND_DAT8: P1.18 R84.1 U25.2
SND_DAV: C45.1 P1.19 R21.2
SND_RDY: C43.1 P1.11 R19.2
SOFT_RES: U19.13 U25.3
VIDPWRON: U19.2 U25.5
VIDSNDRD: U7.12 U9.13 U11.12 U25.11
WR-LATCH: U5.11 U8.7 U9.11
YAM: U8.14 U14.7
YAM1-OUT: C53.+ R40.2
YAM2-OUT: C57.+ R44.2

## Tracks (layer width: path | path; a pad name or v marks a point on that pad's centre or on a via)
5V  (83 unrouted)
12V  (14 unrouted)
+9V  (2 unrouted)
+12VDEC  (3 unrouted)
/E  (4 unrouted)
/EORQ  (1 unrouted)
/Q  (1 unrouted)
/RAMWR  (1 unrouted)
/RD  (3 unrouted)
/WR  (4 unrouted)
A0  (3 unrouted)
A1  (2 unrouted)
A2  (2 unrouted)
A3  (2 unrouted)
A4  (2 unrouted)
A5  (2 unrouted)
A6  (2 unrouted)
A7  (2 unrouted)
A8  (2 unrouted)
A9  (2 unrouted)
A10  (3 unrouted)
A11  (3 unrouted)
A12  (3 unrouted)
A13  (2 unrouted)
A14  (1 unrouted)
A15  (3 unrouted)
ADPCM  (1 unrouted)
ADPCMCLK  (1 unrouted)
AGND  (55 unrouted)
ATE1  (15 unrouted)
ATE_CLR  (5 unrouted)
B_SND_RD  (2 unrouted)
B_VIDDAV  (1 unrouted)
B_VIDRES  (2 unrouted)
BS0  (1 unrouted)
BS1  (1 unrouted)
BS2  (2 unrouted)
D0  (9 unrouted)
D1  (9 unrouted)
D2  (9 unrouted)
D3  (8 unrouted)
D4  (7 unrouted)
D5  (7 unrouted)
D6  (7 unrouted)
D7  (7 unrouted)
DAC  (1 unrouted)
DAC-OUT  (3 unrouted)
FFO  (1 unrouted)
FIRQ  (2 unrouted)
GND  (95 unrouted)
IRQ  (3 unrouted)
MIX-OUT  (1 unrouted)
N$1  (1 unrouted)
N$2  (2 unrouted)
N$3  (2 unrouted)
N$4  (1 unrouted)
N$5  (2 unrouted)
N$6  (1 unrouted)
N$7  (2 unrouted)
N$8  (6 unrouted)
N$9  (1 unrouted)
N$10  (1 unrouted)
N$11  (1 unrouted)
N$12  (2 unrouted)
N$13  (1 unrouted)
N$14  (3 unrouted)
N$15  (1 unrouted)
N$16  (1 unrouted)
N$17  (1 unrouted)
N$18  (2 unrouted)
N$19  (1 unrouted)
N$20  (1 unrouted)
N$21  (1 unrouted)
N$22  (1 unrouted)
N$23  (1 unrouted)
N$24  (2 unrouted)
N$25  (2 unrouted)
N$26  (2 unrouted)
N$27  (2 unrouted)
N$28  (2 unrouted)
N$29  (2 unrouted)
N$30  (2 unrouted)
N$31  (2 unrouted)
N$32  (2 unrouted)
N$33  (1 unrouted)
N$34  (3 unrouted)
N$35  (3 unrouted)
N$36  (3 unrouted)
N$37  (1 unrouted)
N$38  (1 unrouted)
N$39  (1 unrouted)
N$40  (1 unrouted)
N$41  (1 unrouted)
N$42  (1 unrouted)
N$43  (1 unrouted)
N$44  (3 unrouted)
N$45  (1 unrouted)
N$46  (2 unrouted)
N$47  (1 unrouted)
N$48  (1 unrouted)
N$49  (3 unrouted)
N$50  (3 unrouted)
N$51  (2 unrouted)
N$52  (1 unrouted)
N$53  (1 unrouted)
N$54  (3 unrouted)
N$55  (2 unrouted)
N$56  (3 unrouted)
N$57  (2 unrouted)
N$58  (2 unrouted)
N$59  (3 unrouted)
N$60  (3 unrouted)
N$61  (3 unrouted)
N$62  (2 unrouted)
N$63  (2 unrouted)
N$64  (3 unrouted)
N$65  (2 unrouted)
N$66  (2 unrouted)
N$67  (2 unrouted)
N$68  (3 unrouted)
N$69  (2 unrouted)
N$70  (3 unrouted)
N$71  (3 unrouted)
N$72  (3 unrouted)
N$73  (2 unrouted)
N$74  (7 unrouted)
N$75  (1 unrouted)
N$76  (7 unrouted)
N$77  (2 unrouted)
N$78  (3 unrouted)
N$79  (3 unrouted)
N$80  (2 unrouted)
N$81  (3 unrouted)
N$82  (2 unrouted)
N$83  (3 unrouted)
N$84  (2 unrouted)
N$85  (1 unrouted)
N$86  (3 unrouted)
N$87  (1 unrouted)
N$88  (1 unrouted)
N$89  (2 unrouted)
N$90  (2 unrouted)
N$91  (3 unrouted)
N$92  (1 unrouted)
N$93  (1 unrouted)
N$94  (1 unrouted)
N$95  (1 unrouted)
N$96  (1 unrouted)
N$97  (1 unrouted)
N$98  (1 unrouted)
N$99  (1 unrouted)
N$100  (5 unrouted)
N$101  (1 unrouted)
N$102  (1 unrouted)
N$103  (5 unrouted)
N$104  (1 unrouted)
N$105  (1 unrouted)
N$106  (1 unrouted)
N$107  (1 unrouted)
N$108  (1 unrouted)
N$109  (1 unrouted)
N$110  (1 unrouted)
N$111  (1 unrouted)
N$112  (2 unrouted)
N$113  (1 unrouted)
N$114  (4 unrouted)
N$115  (2 unrouted)
N$116  (2 unrouted)
N$117  (2 unrouted)
N$118  (2 unrouted)
N$119  (2 unrouted)
N$120  (13 unrouted)
N$122  (2 unrouted)
N$123  (2 unrouted)
N$127  (1 unrouted)
N$128  (1 unrouted)
N$134  (2 unrouted)
PCM-A0  (2 unrouted)
PCM-A1  (2 unrouted)
PCM-A2  (2 unrouted)
PCM-A3  (2 unrouted)
PCM-A4  (2 unrouted)
PCM-A5  (2 unrouted)
PCM-A6  (2 unrouted)
PCM-A7  (2 unrouted)
PCM-A8  (2 unrouted)
PCM-A9  (2 unrouted)
PCM-A10  (2 unrouted)
PCM-A11  (2 unrouted)
PCM-A12  (2 unrouted)
PCM-A13  (2 unrouted)
PCM-A14  (2 unrouted)
PCM-A15  (2 unrouted)
PCM-A16  (2 unrouted)
PCM-A17  (2 unrouted)
PCM-BS  (1 unrouted)
PCM-D0  (2 unrouted)
PCM-D1  (2 unrouted)
PCM-D2  (2 unrouted)
PCM-D3  (3 unrouted)
PCM-D4  (1 unrouted)
PCM-D5  (2 unrouted)
PCM-D6  (2 unrouted)
PCM-D7  (2 unrouted)
PCM-OUT  (3 unrouted)
R/W  (1 unrouted)
RA17-0  (1 unrouted)
RA17-1  (1 unrouted)
RA18-0  (1 unrouted)
RA18-1  (1 unrouted)
RD-LATCH  (4 unrouted)
RESET  (5 unrouted)
SND_DAT0  (2 unrouted)
SND_DAT1  (2 unrouted)
SND_DAT2  (2 unrouted)
SND_DAT3  (2 unrouted)
SND_DAT4  (2 unrouted)
SND_DAT5  (2 unrouted)
SND_DAT6  (2 unrouted)
SND_DAT7  (2 unrouted)
SND_DAT8  (2 unrouted)
SND_DAV  (2 unrouted)
SND_RDY  (2 unrouted)
SOFT_RES  (1 unrouted)
VIDPWRON  (1 unrouted)
VIDSNDRD  (3 unrouted)
WR-LATCH  (2 unrouted)
YAM  (1 unrouted)
YAM1-OUT  (1 unrouted)
YAM2-OUT  (1 unrouted)